# EAGLE board Display v12 (EAGLE 9.7.0)
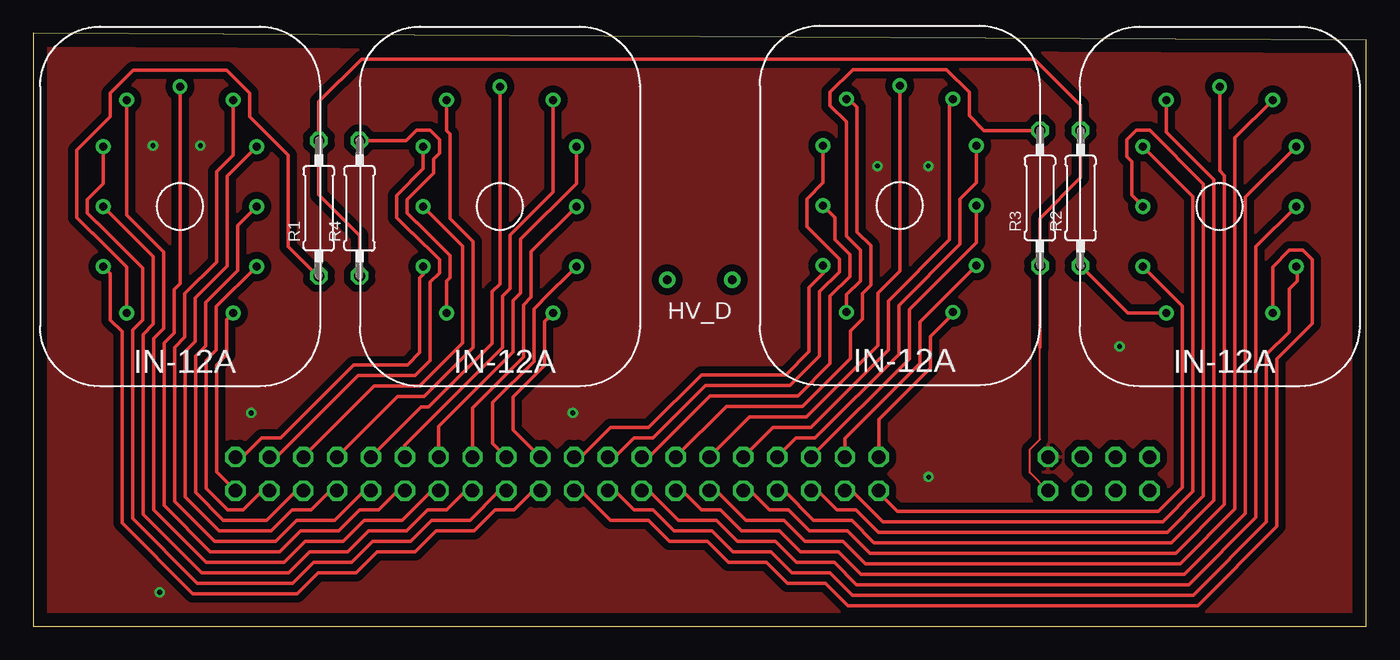
[diagram p0: board, top side]
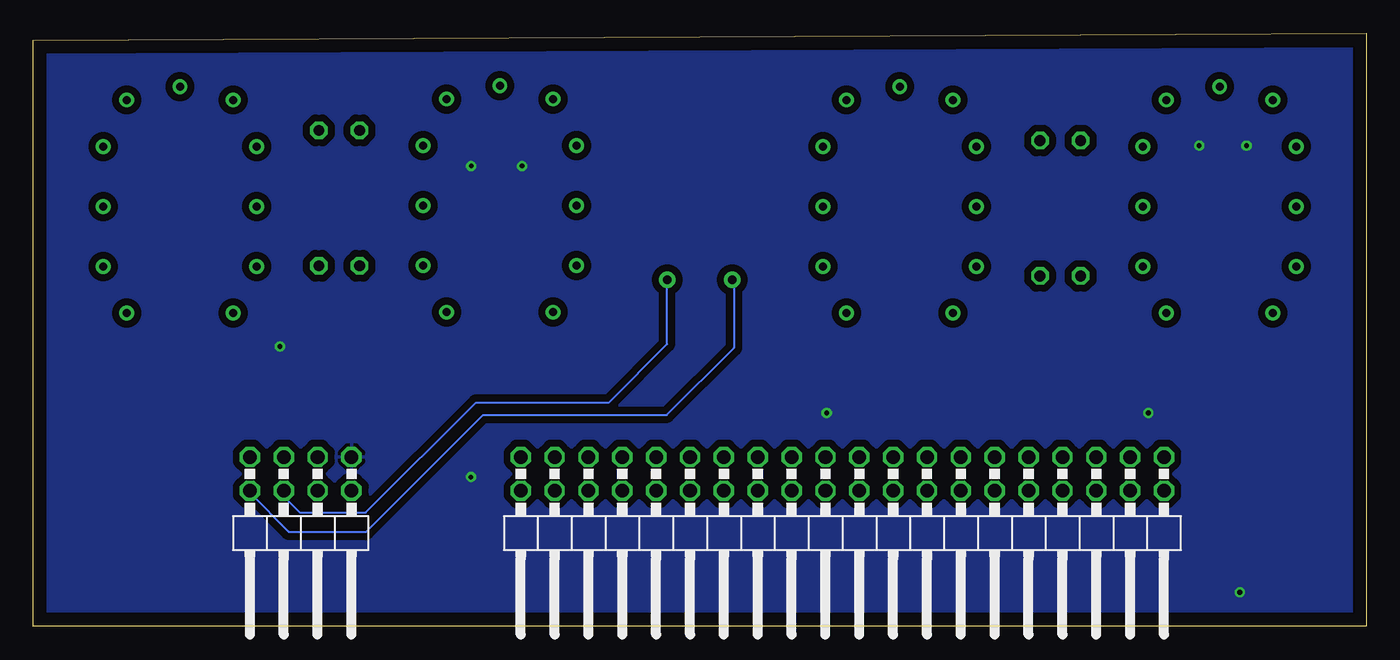
[diagram p1: board, bottom side, seen from below]

Size 100 x 44.5 mm. Coordinates in mm from the lower left corner, seen from the top.
Outline: 0,0 100,0 100,44 0,44.5 0,0
Copper layers (1*16): Top 0.035mm / dielectric 1.5mm / Bottom 0.035mm
Design rules "Fusion Electronics Design Rules": minimum track width 6mil, minimum drill 0.35mm, track to track 21mil, track to pad 21mil, pad to pad 6mil, via to via 6mil, smd to smd 6mil, copper to edge 40mil, drill to drill 6mil, minimum pad ring 10mil, minimum via ring 8mil, stop-mask expansion 4mil, vias tented up to drill 0mil, thermal gap 10mil

## Footprints (pad centres in the part's own frame; a part is rotated, then mirrored left to right if it is on the bottom)
XTALRR488W43L1135T465H1346B = drill 0.63 pad 1.23: 1 -2.44,0; 2 2.44,0
2X20/90 = drill 1.016 octagon: 1 -24.13,-6.35; 2 -24.13,-3.81; 3 -21.59,-6.35; 4 -21.59,-3.81; 5 -19.05,-6.35; 6 -19.05,-3.81; 7 -16.51,-6.35; 8 -16.51,-3.81; 9 -13.97,-6.35; 10 -13.97,-3.81; 11 -11.43,-6.35; 12 -11.43,-3.81; 13 -8.89,-6.35; 14 -8.89,-3.81; 15 -6.35,-6.35; 16 -6.35,-3.81; 17 -3.81,-6.35; 18 -3.81,-3.81; 19 -1.27,-6.35; 20 -1.27,-3.81; 21 1.27,-6.35; 22 1.27,-3.81; 23 3.81,-6.35; 24 3.81,-3.81; 25 6.35,-6.35; 26 6.35,-3.81; 27 8.89,-6.35; 28 8.89,-3.81; 29 11.43,-6.35; 30 11.43,-3.81; 31 13.97,-6.35; 32 13.97,-3.81; 33 16.51,-6.35; 34 16.51,-3.81; 35 19.05,-6.35; 36 19.05,-3.81; 37 21.59,-6.35; 38 21.59,-3.81; 39 24.13,-6.35; 40 24.13,-3.81
2X04/90 = drill 1.016 octagon: 1 -3.81,-6.35; 2 -3.81,-3.81; 3 -1.27,-6.35; 4 -1.27,-3.81; 5 1.27,-6.35; 6 1.27,-3.81; 7 3.81,-6.35; 8 3.81,-3.81
PR-D2.3XL6.5MM = drill 0.813 octagon: 1 -4.953,0; 2 5.207,0
IN-12 = drill 0.6: P$1 6.5,5.5; P$2 4.75,9; P$3 4.75,18; P$4 4.75,13.5; P$5 6.5,21.5; P$6 10.5,22.5; P$7 14.5,21.5; P$8 16.25,18; P$9 16.25,13.5; P$10 16.25,9; P$11 14.5,5.5

## Placement (x,y rotation side)
HV_D  HV_D  [XTALRR488W43L1135T465H1346B]  50,26 180 top
JP1  PINHD-2X20/90  [2X20/90]  39.3,6.35 180 bottom
JP2  PINHD-2X4/90  [2X04/90]  79.94,6.35 180 bottom
R1  2.2K  [PR-D2.3XL6.5MM]  21.42,31.24 90 top
R2  2.2K  [PR-D2.3XL6.5MM]  78.57,32 90 top
R3  2.2K  [PR-D2.3XL6.5MM]  75.53,32 90 top
R4  2.2K  [PR-D2.3XL6.5MM]  24.47,31.24 90 top
U$1  IN-12  [IN-12]  0.5,18 0 top
U$2  IN-12  [IN-12]  78.5,18 0 top
U$3  IN-12  [IN-12]  24.5,18 0 top
U$4  IN-12  [IN-12]  54.5,18.07 0 top

## Library data of the parts
HV_D = Frequency-Source; CATEGORY: Crystals; PACKAGE_SIZE: HC-49/US; PACKAGE_TYPE: THT
JP1 = Connector; CATEGORY: Headers; DESCRIPTION: Header, Right Angle, 2x20 Position; MANUFACTURER: Generic; MPN: Generic; OPERATING_TEMPERATURE: Generic; PART_STATUS: Active; PITCH: 0.100" (2.54mm); ROHS_COMPLIANCE: Generic; SERIES: Generic; SUB-CATEGORY: Headers, Male Pins; TYPE: Board to Board or Cable, Unshrouded, Through Hole, Right Angle
JP2 = Connector; CATEGORY: Headers; DESCRIPTION: Header, Right Angle, 2x4 Position; MANUFACTURER: Generic; MPN: Generic; OPERATING_TEMPERATURE: Generic; PART_STATUS: Active; PITCH: 0.100" (2.54mm); ROHS_COMPLIANCE: Generic; SERIES: Generic; SUB-CATEGORY: Headers, Male Pins; TYPE: Board to Board or Cable, Unshrouded, Through Hole, Right Angle
R1-R4 = OPL_Resistor; MPN: FHCFR-1/4W-222J
U$1-U$4 = IN-12

## Nets
AGND: JP2.1
N$1: JP1.2 U$1.P$11
N$2: JP1.4 U$1.P$10
N$3: JP1.6 U$1.P$9
N$4: JP1.8 U$1.P$8
N$5: JP1.10 U$1.P$7
N$6: JP1.12 U$1.P$6
N$7: JP1.14 U$1.P$5
N$8: JP1.16 U$1.P$4
N$9: JP1.18 U$1.P$3
N$10: JP1.20 U$1.P$2
N$11: JP1.22 U$2.P$11
N$12: JP1.24 U$2.P$10
N$13: JP1.26 U$2.P$9
N$14: JP1.28 U$2.P$8
N$15: JP1.30 U$2.P$7
N$16: JP1.32 U$2.P$6
N$17: JP1.34 U$2.P$5
N$18: JP1.36 U$2.P$4
N$19: JP1.38 U$2.P$3
N$20: JP1.40 U$2.P$2
N$21: JP1.1 U$3.P$2
N$22: JP1.3 U$3.P$3
N$23: JP1.5 U$3.P$4
N$24: JP1.7 U$3.P$5
N$25: JP1.9 U$3.P$6
N$26: JP1.11 U$3.P$7
N$27: JP1.13 U$3.P$8
N$28: JP1.15 U$3.P$9
N$29: JP1.17 U$3.P$10
N$30: JP1.19 U$3.P$11
N$31: JP1.21 U$4.P$2
N$32: JP1.23 U$4.P$3
N$33: JP1.25 U$4.P$4
N$34: JP1.27 U$4.P$5
N$35: JP1.29 U$4.P$6
N$36: JP1.31 U$4.P$7
N$37: JP1.33 U$4.P$8
N$38: JP1.35 U$4.P$9
N$39: JP1.37 U$4.P$10
N$40: JP1.39 U$4.P$11
N$41: HV_D.2 JP2.8
N$42: HV_D.1 JP2.6
N$45: R1.1 U$1.P$1
N$46: R2.1 U$2.P$1
N$47: R3.2 U$4.P$1
N$48: R4.2 U$3.P$1
N$49: JP2.2 R1.2 R2.2 R3.1 R4.1

## Tracks (layer width: path | path; a pad name or v marks a point on that pad's centre or on a via)
AGND  (via drill 0.35)
  other vias: 40.47,16 16.34,16 9.49,2.54 12.53,36.07 8.98,36.07 63.33,34.54 67.14,34.54 67.16,11.2 81.5,21
  pour Top: 0.13,0.13 99.87,0.13 99.87,43.87 0.13,43.87
  pour Bottom: 0.13,0.13 99.87,0.13 99.87,43.87 0.13,43.87
N$1
  Top 0.254: JP1.2 13.75,11.58 13.75,19.62 14.51,20.39 14.51,23.01 U$1.P$11
N$2
  Top 0.254: JP1.4 17.18,10.16 15.76,8.74 14.58,8.74 12.96,10.36 12.96,19.95 13.73,20.71 13.73,23.98 U$1.P$10
N$3
  Top 0.254: JP1.6 19.72,10.16 17.51,7.95 14.26,7.95 12.17,10.03 12.17,20.27 12.94,21.04 12.94,24.3 15.33,26.69 15.33,30.08 U$1.P$9
N$4
  Top 0.254: JP1.8 22.26,10.16 20.84,8.74 19.41,8.74 17.84,7.16 13.93,7.16 11.38,9.71 11.38,20.6 12.15,21.37 12.15,24.63 14.54,27.02 14.54,33.79 U$1.P$8
N$5
  Top 0.254: U$1.P$7 15,35.36 13.75,34.12 13.75,27.34 11.36,24.95 11.36,21.69 10.6,20.93 10.6,9.38 13.6,6.38 18.16,6.38 19.74,7.95 22.59,7.95 24.8,10.16 JP1.10
N$6
  Top 0.254: U$1.P$6 11,25.7 10.58,25.28 10.58,22.02 9.81,21.25 9.81,9.05 13.28,5.59 18.49,5.59 20.07,7.16 22.92,7.16 24.49,8.74 25.92,8.74 27.34,10.16 JP1.12
N$7
  Top 0.254: JP1.14 29.88,10.16 27.67,7.95 24.82,7.95 23.24,6.38 20.39,6.38 18.82,4.8 12.95,4.8 9.02,8.73 9.02,21.58 9.79,22.34 9.79,28.07 7,30.86 U$1.P$5
N$8
  Top 0.254: JP1.16 32.42,10.16 31,8.74 29.57,8.74 28,7.16 25.14,7.16 23.57,5.59 20.72,5.59 19.14,4.01 12.62,4.01 8.24,8.4 8.24,21.91 9,22.67 9,27.75 U$1.P$4
N$9
  Top 0.254: JP1.18 34.96,10.16 32.75,7.95 29.9,7.95 28.32,6.38 25.47,6.38 23.9,4.8 21.04,4.8 19.47,3.23 12.3,3.23 7.45,8.07 7.45,22.23 8.21,23 8.21,26.87 4.79,30.29 4.75,30.29 4.04,31 4.04,32 5.25,33.22 U$1.P$3
N$10
  Top 0.254: JP1.20 37.5,10.16 36.08,8.74 34.65,8.74 33.08,7.16 30.23,7.16 28.65,5.59 25.8,5.59 24.22,4.01 21.37,4.01 19.8,2.44 11.97,2.44 6.66,7.75 6.66,22.12 5.79,23 5.79,26.46 U$1.P$2
N$11
  Top 0.254: JP1.22 41.1,10.16 43.31,7.95 46.16,7.95 47.74,6.38 50.59,6.38 52.16,4.8 55.02,4.8 56.59,3.23 59.44,3.23 61.12,1.55 87.35,1.55 93.3,7.5 93.3,20.06 95.96,22.73 95.96,27.5 95.25,28.21 94.25,28.21 93,26.97 U$2.P$11
N$12
  Top 0.254: JP1.24 43.64,10.16 45.06,8.74 46.49,8.74 48.06,7.16 50.91,7.16 52.49,5.59 55.34,5.59 56.92,4.01 59.77,4.01 61.45,2.34 87.03,2.34 92.51,7.83 92.51,20.39 94.21,22.09 94.21,25.29 94.83,25.91 94.83,26.92 U$2.P$10
N$13
  Top 0.254: JP1.26 46.18,10.16 48.39,7.95 51.24,7.95 52.82,6.38 55.67,6.38 57.24,4.8 60.1,4.8 61.77,3.12 86.7,3.12 91.73,8.15 91.73,28.48 U$2.P$9
N$14
  Top 0.254: JP1.28 48.72,10.16 50.14,8.74 51.57,8.74 53.14,7.16 55.99,7.16 57.57,5.59 60.42,5.59 62.1,3.91 86.37,3.91 90.94,8.48 90.94,32.19 U$2.P$8
N$15
  Top 0.254: JP1.30 51.26,10.16 53.47,7.95 56.32,7.95 57.9,6.38 60.75,6.38 62.42,4.7 86.05,4.7 90.15,8.8 90.15,36.65 U$2.P$7
N$16
  Top 0.254: JP1.32 53.8,10.16 55.22,8.74 56.65,8.74 58.22,7.16 61.08,7.16 62.75,5.49 85.72,5.49 89.36,9.13 89.36,33.83 89,34.2 U$2.P$6
N$17
  Top 0.254: U$2.P$5 85,37.08 88.58,33.5 88.58,9.46 85.39,6.27 63.08,6.27 61.4,7.95 58.55,7.95 56.34,10.16 JP1.34
N$18
  Top 0.254: JP1.36 58.88,10.16 60.3,8.74 61.73,8.74 63.4,7.06 85.07,7.06 87.79,9.78 87.79,33.18 83.75,37.21 82.75,37.21 82.04,36.5 82.04,35.24 82.41,34.87 82.41,32.34 U$2.P$4
N$19
  Top 0.254: JP1.38 61.42,10.16 63.73,7.85 84.74,7.85 87,10.11 87,32.25 U$2.P$3
N$20
  Top 0.254: JP1.40 63.43,10.03 64.82,8.64 84.42,8.64 86.21,10.43 86.21,24.04 U$2.P$2
N$21
  Top 0.254: U$3.P$2 29.25,26.4 29,26.14 29,20.53 28.08,19.61 24.03,19.61 18.55,14.12 17.12,14.12 15.7,12.7 JP1.1
N$22
  Top 0.254: U$3.P$3 29.25,34.33 27.25,32.33 27.25,30.67 28.42,29.5 28.47,29.5 30.46,27.5 30.46,26.5 29.79,25.82 29.79,19.95 28.66,18.82 24.36,18.82 18.24,12.7 JP1.3
N$23
  Top 0.254: JP1.5 25.58,18.03 28.98,18.03 32.21,21.27 32.21,28.54 U$3.P$4
N$24
  Top 0.254: JP1.7 27.34,17.25 29.33,17.25 33,20.92 33,28.86 31.25,30.61 31.25,36.93 31,37.19 U$3.P$5
N$25
  Top 0.254: U$3.P$6 35,25.67 34.43,25.1 34.43,21.23 29.66,16.46 29.09,16.46 JP1.9
N$26
  Top 0.254: U$3.P$7 39,32.58 35.79,29.37 35.79,25.34 35.22,24.77 35.22,20.91 27.87,13.56 JP1.11
N$27
  Top 0.254: U$3.P$8 40.75,33.22 36.58,29.04 36.58,25.02 36,24.45 36,20.58 30.41,14.99 JP1.13
N$28
  Top 0.254: U$3.P$9 37.36,28.11 37.36,24.69 36.79,24.12 36.79,20.21 32.95,16.37 JP1.15
N$29
  Top 0.254: U$3.P$10 38.15,24.4 38.15,24.37 37.58,23.8 37.58,19.89 34.47,16.78 34.47,13.72 JP1.17
N$30
  Top 0.254: JP1.19 36,14.73 36,17.19 38.37,19.56 38.37,22.87 U$3.P$11
N$31
  Top 0.254: U$4.P$2 59.25,26.47 58.21,25.43 58.21,20.63 56.46,18.87 50.12,18.87 46.16,14.91 43.31,14.91 41.1,12.7 JP1.21
N$32
  Top 0.254: U$4.P$3 59.25,33.29 58.04,32.07 58.04,30 60.46,27.57 60.46,26.57 59,25.1 59,20.3 56.78,18.09 50.45,18.09 46.49,14.12 45.06,14.12 43.64,12.7 JP1.23
N$33
  Top 0.254: U$4.P$4 60.13,30.69 60.13,29.02 61.25,27.9 61.25,26.24 59.79,24.77 59.79,19.72 57.36,17.3 50.78,17.3 46.18,12.7 JP1.25
N$34
  Top 0.254: JP1.27 52,16.51 57.71,16.51 61.3,20.11 61.3,22.16 62.21,23.07 62.21,24.98 62.83,25.59 62.83,28.55 61.79,29.59 61.79,38.94 61.16,39.57 U$4.P$5
N$35
  Top 0.254: U$4.P$6 65,26.65 63.36,25.01 63.36,21.05 58.01,15.7 53.73,15.7 JP1.29
N$36
  Top 0.254: U$4.P$7 68.75,39.32 68.75,29.01 64.15,24.41 64.15,20.72 58.33,14.91 55.48,14.91 JP1.31
N$37
  Top 0.254: U$4.P$8 70.75,33.29 69.54,32.07 69.54,28.69 64.93,24.09 64.93,20.4 58.66,14.12 57.23,14.12 JP1.33
N$38
  Top 0.254: U$4.P$9 70.75,28.79 65.72,23.76 65.72,20.07 JP1.35
N$39
  Top 0.254: U$4.P$10 66.51,22.83 66.51,19.7 60.89,14.09 JP1.37
N$40
  Top 0.254: U$4.P$11 69,23.45 67.3,21.74 67.3,19.38 63.43,15.51 JP1.39
N$41
  Bottom 0.152: JP2.8 83.75,10 80.84,7.09 75.02,7.09 66.26,15.85 52.48,15.85 47.44,20.89 47.44,25.88 HV_D.2
N$42
  Bottom 0.152: JP2.6 81.21,9.74 80,8.53 75.05,8.53 66.8,16.79 56.83,16.79 52.44,21.17 HV_D.1
N$45
  Top 0.254: U$1.P$1 7,26.97 4.47,29.5 4.42,29.5 3.25,30.67 3.25,35.72 5.79,38.25 5.79,40 7.5,41.71 14.5,41.71 16.21,40 16.21,38.25 19.11,35.35 19.11,28.5 21.33,26.29 R1.1
N$46
  Top 0.254: R2.1 82.13,23.5 U$2.P$1
N$47
  Top 0.254: R3.2 71.33,37.21 70.21,38.32 70.21,40.07 68.5,41.78 61.5,41.78 59.79,40.07 59.79,39.07 61,37.85 61,29.27 62.04,28.23 62.04,25.91 61,24.88 U$4.P$1
N$48
  Top 0.254: R4.2 27.98,36.45 28.75,37.21 29.75,37.21 30.46,36.5 30.46,35.5 30.04,35.07 30.04,34.01 28.04,32 28.04,31 28.75,30.29 28.8,30.29 31.25,27.83 31.25,26.17 31,25.92 U$3.P$1
N$49
  Top 0.152: 75.53,20.92 75.53,14.04 74.76,13.27 74.76,11.53 JP2.2
  Top 0.254: R4.1 24.47,29.34 21.42,32.38 R1.2 21.42,39.37 24.63,42.57 75.12,42.57 78.57,39.12 R2.2 78.57,33.66 75.53,30.61 R3.1 75.53,20.92